# EAGLE board bromsbank (EAGLE 9.3.1)
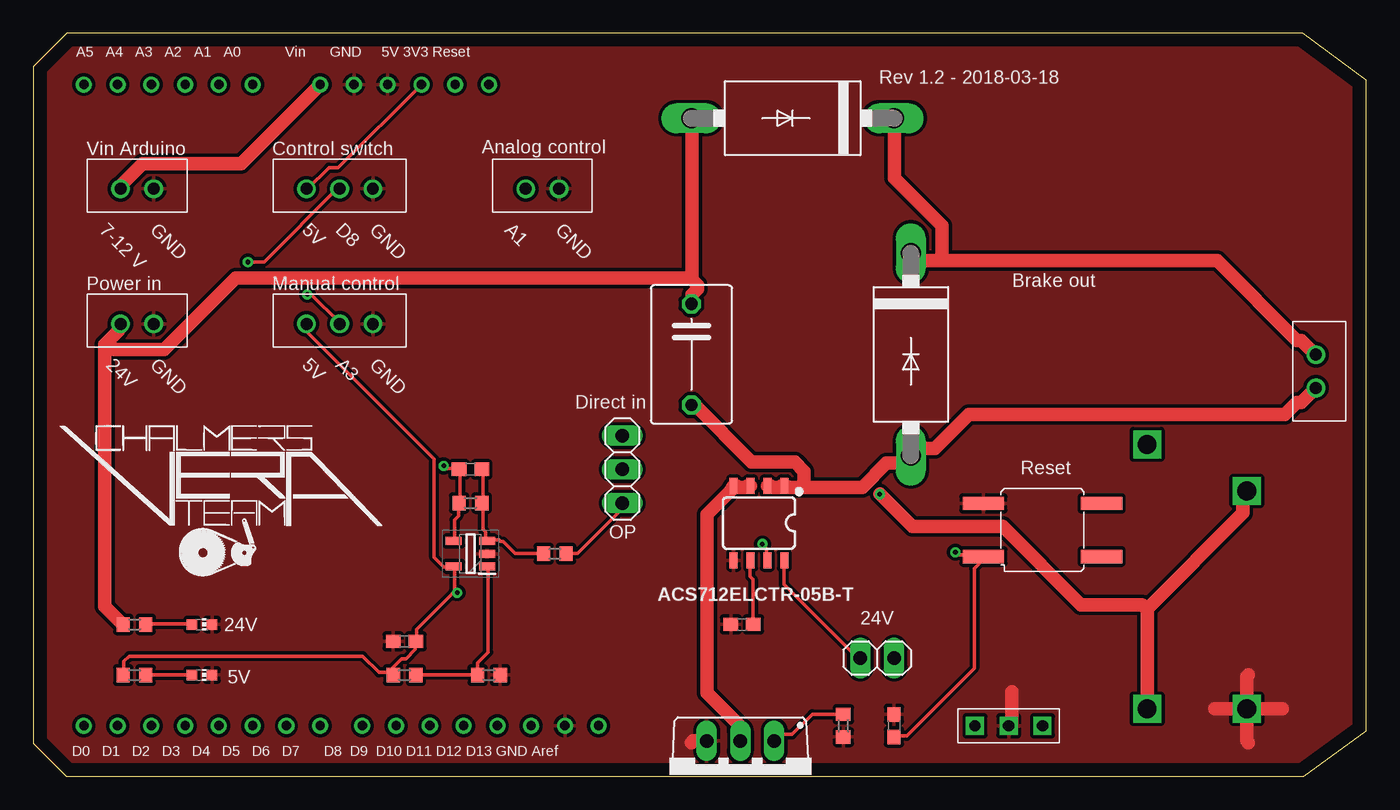
[diagram p0: board, top side]
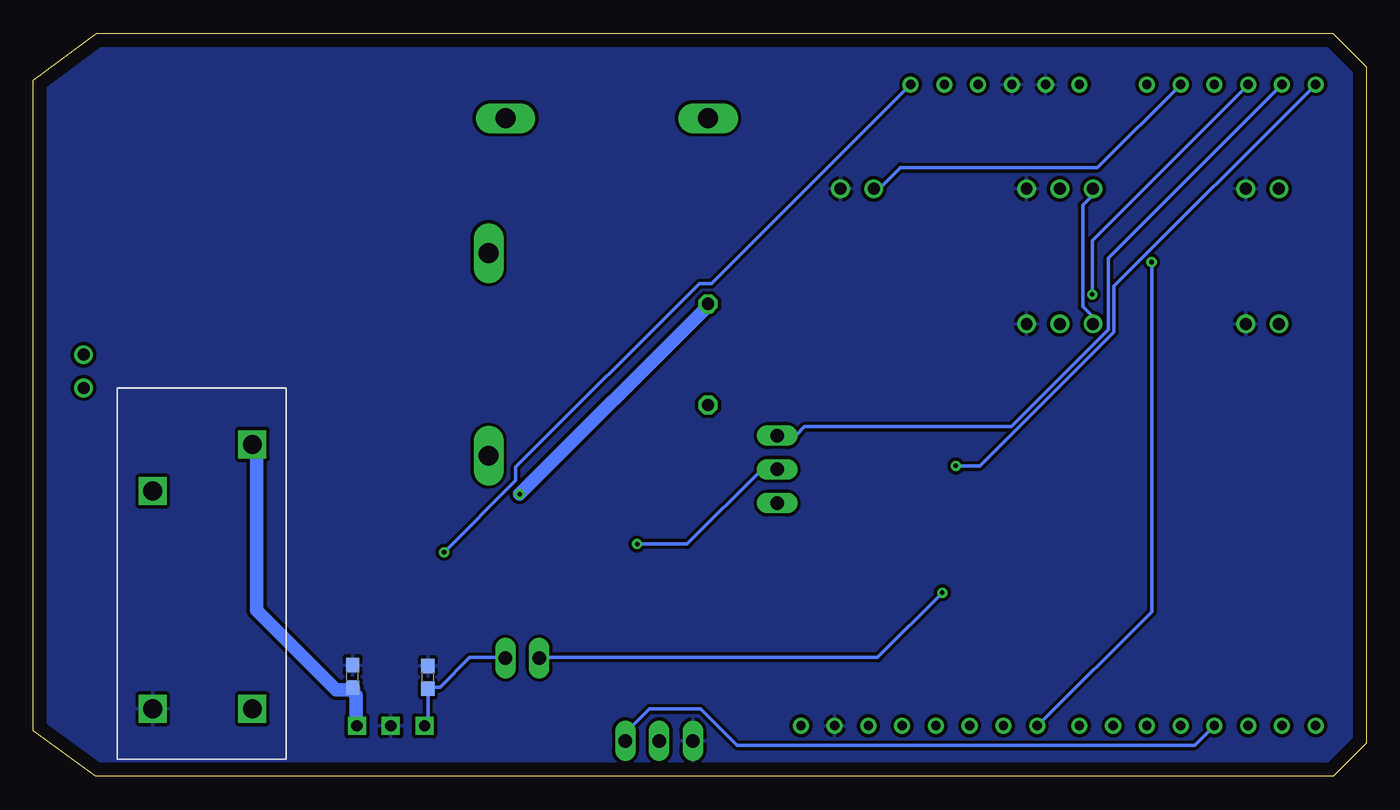
[diagram p1: board, bottom side, seen from below]

Size 100.31 x 55.93 mm. Coordinates in mm from the lower left corner, seen from the top.
Outline: 0,53.42 0,2.47 2.47,0 95.63,0 100.31,3.41 100.31,52.41 95.51,55.93 2.51,55.93 0,53.42
Copper layers (1*16): Top 0.035mm / dielectric 1.5mm / Bottom 0.035mm
Design rules "default": minimum track width 6mil, minimum drill 0.35mm, track to track 6mil, track to pad 6mil, pad to pad 6mil, via to via 6mil, smd to smd 6mil, copper to edge 40mil, drill to drill 6mil, minimum pad ring 10mil, minimum via ring 8mil, stop-mask expansion 4mil, vias tented up to drill 0mil, thermal gap 10mil
Net classes: 0 default: width 0.254 mm; 1 power: width 1.016 mm, clearance 0.254 mm

## Footprints (pad centres in the part's own frame; a part is rotated, then mirrored left to right if it is on the bottom)
CHIP-LED0603 = smd 0.8 x 0.8: A 0,-0.75; C 0,0.75
B2B-EH = drill 0.9: 1 -1.25,0; 2 1.25,0
B3B-EH = drill 0.9: 1 -2.5,0; 2 0,0; 3 2.5,0
C0603 = smd 1.1 x 1: 1 -0.85,0; 2 0.85,0
C075-063X106 = drill 0.914 octagon: 1 -3.81,0; 2 3.81,0
DO201-15 = drill 1.499 long: A 7.62,0; C -7.62,0
SOT95P280X145-5N = smd 1.2 x 0.6: 1 -1.25,0.95; 2 -1.25,0; 3 -1.25,-0.95; 4 1.25,-0.95; 5 1.25,0.95
1X03 = drill 1.016 long: 1 -2.54,0; 2 0,0; 3 2.54,0
1X02 = drill 1.016 long: 1 -1.27,0; 2 1.27,0
TO220BV = drill 1.016 long: D 0,-2.54; G -2.54,-2.54; S 2.54,-2.54
R0603 = smd 1 x 1.1: 1 -0.85,0; 2 0.85,0
KSEK43GLFS = smd 3.1 x 1: 1 -4.45,-2; 2 4.45,-2; 3 -4.45,2; 4 4.45,2
SO08 = smd 0.6 x 1.2: 1 -1.905,-2.8; 2 -0.635,-2.8; 3 0.635,-2.8; 4 1.905,-2.8; 5 1.905,2.8; 6 0.635,2.8; 7 -0.635,2.8; 8 -1.905,2.8
ARDUINO_UNO_SHIELD = drill 0.7: P$1 0,0; P$2 2.54,0; P$3 5.08,0; P$4 7.62,0; P$5 10.16,0; P$6 12.7,0; P$7 15.24,0; P$8 17.78,0; P$9 20.955,0; P$10 23.495,0; P$11 26.035,0; P$12 28.575,0; P$13 31.115,0; P$14 33.655,0; P$15 36.195,0; P$16 38.735,0; P$17 0,48.26; P$18 2.54,48.26; P$19 5.08,48.26; P$20 7.62,48.26; P$21 10.16,48.26; P$22 12.7,48.26; P$23 17.78,48.26; P$24 20.32,48.26; P$25 22.86,48.26; P$26 25.4,48.26; P$27 27.94,48.26; P$28 30.48,48.26
TO-220 = drill 0.85 square: P$1 -2.54,0; P$2 0,0; P$3 2.54,0
SDT-S-124DMR = drill 1.4 square: P$1 0,0; P$2 0,7.5; P$3 16.4,7.5; P$4 19.9,0

## Placement (x,y rotation side)
5V  CHIP-LED0603  [CHIP-LED0603]  12.7,7.62 270 top
BRAKE  EH_B2B-EH  [B2B-EH]  96.52,30.48 270 top
BRAKECONTROLSWITCH  EH_B3B-EH  [B3B-EH]  23.06,44.22 0 top
BRAKEINPUT  EH_B2B-EH  [B2B-EH]  38.31,44.22 0 top
BRAKEPOWER  CHIP-LED0603  [CHIP-LED0603]  12.7,11.43 270 top
C1  0.01µF  [C0603]  53.34,11.43 180 top
C2  0.01µF  [C0603]  27.94,10.16 180 top
C3  1000pF  [C0603]  32.9,23.1 0 top
C4  [C075-063X106]  49.53,31.75 270 top
C5  100n  [C0603]  64.77,3.81 270 top
C6  0.33µF  [C0603]  76.28,7.52 90 bottom
C7  0.1µF  [C0603]  70.61,7.46 90 bottom
D1  1N5400  [DO201-15]  57.15,49.53 180 top
D2  1N5400  [DO201-15]  66.04,31.75 270 top
IC1  LM321MF_NOPB  [SOT95P280X145-5N]  32.9,16.75 180 top
JP1  [1X03]  44.33,23.1 270 top
JP2  [1X02]  63.5,8.89 0 top
MANUALBRAKECONTROL  EH_B3B-EH  [B3B-EH]  23.06,34.06 0 top
POWERINPUT  EH_B2B-EH  [B2B-EH]  7.82,34.06 0 top
Q1  STP5NA50  [TO220BV]  53.21,0.13 180 top
R1  100k  [R0603]  27.94,7.62 0 top
R2  100k  [R0603]  34.29,7.62 0 top
R3  1k  [R0603]  39.25,16.75 180 top
R4  3k3  [R0603]  32.9,20.56 180 top
R5  10k  [R0603]  60.96,3.81 270 top
R6  1.2k  [R0603]  7.62,11.43 0 top
R7  330  [R0603]  7.62,7.62 0 top
S1  KSEK43GLFS  [KSEK43GLFS]  75.95,18.54 0 top
U$1  ACS712ELCTR-05B-T  [SO08]  54.61,19.05 180 top
U$2  ARDUINO_SHIELD  [ARDUINO_UNO_SHIELD]  3.81,3.81 0 top
U$3  L7805ABV-DG  [TO-220]  73.41,3.8 180 top
U$4  RELAY_SDT-S-124DMR,601  [SDT-S-124DMR]  83.82,5.08 90 bottom
VIN_ARDUINO  EH_B2B-EH  [B2B-EH]  7.82,44.22 0 top

## Library data of the parts
5V BRAKEPOWER = CASE-LED
BRAKE BRAKECONTROLSWITCH BRAKEINPUT MANUALBRAKECONTROL POWERINPUT VIN_ARDUINO = CASE-JST
C1 C6 C7 = CASE-RCL; SPICEPREFIX: C
C2 C3 C5 R1-R7 = CASE-RCL
C4 = rcl; SPICEPREFIX: C
D1 D2 = diode
IC1 = SamacSys_Parts; DESCRIPTION: Single SMT op amp,LM321MF 1MHz SOT23-5; HEIGHT: 1.45mm; MANUFACTURER_NAME: Texas Instruments; MANUFACTURER_PART_NUMBER: LM321MF/NOPB; MOUSER_PART_NUMBER: 926-LM321MF/NOPB
JP1 JP2 = CASE-Pinhead
Q1 = transistor-power
S1 = CASE-Switches
U$1-U$4 = CVT

## Nets
3V3: U$2.P$27
+5V: BRAKECONTROLSWITCH.1 C2.1 IC1.5 JP2.1 MANUALBRAKECONTROL.1 R1.1 R7.1 U$1.8 U$2.P$26
BRAKECONTROLOUT: Q1.G R5.1 U$2.P$4
BRAKEINPUT: BRAKEINPUT.1 U$2.P$21
BRAKESWITCH: BRAKECONTROLSWITCH.2 U$2.P$9
CURRENTIN [power]: BRAKE.2 C4.2 D2.A U$1.1 U$1.2
CURRENTOUT [power]: Q1.D U$1.3 U$1.4
CURRENTSENSE: C3.1 IC1.4 R4.2 U$2.P$17
CURRENTSENSENOOP: JP1.1 U$2.P$18
FILTER: C1.1 U$1.6
GND [power]: 5V.C BRAKECONTROLSWITCH.3 BRAKEINPUT.2 BRAKEPOWER.C C1.2 C2.2 C5.1 C6.2 C7.2 IC1.2 MANUALBRAKECONTROL.3 POWERINPUT.2 Q1.S R2.2 R5.2 S1.3 U$1.5 U$2.P$15 U$2.P$24 U$2.P$25 U$3.P$2 U$4.P$2 VIN_ARDUINO.2
N$1: IC1.1 R1.2 R2.1
N$2: BRAKEPOWER.A R6.2
N$3 [power]: BRAKE.1 D1.C D2.C
N$4: JP1.2 U$1.7
N$5: C5.2 S1.1 U$2.P$28
N$6: JP1.3 R3.1
N$7: 5V.A R7.2
N$8: C3.2 IC1.3 R3.2 R4.1
N$9: C7.1 JP2.2 U$3.P$3
N$10 [power]: C6.1 U$3.P$1 U$4.P$4
POT: MANUALBRAKECONTROL.2 U$2.P$19
V+ [power]: C4.1 D1.A POWERINPUT.1 R6.1 U$4.P$1 U$4.P$3
VIN [power]: U$2.P$23 VIN_ARDUINO.1

## Tracks (layer width: path | path; a pad name or v marks a point on that pad's centre or on a via)
+5V  (via drill 0.35)
  Top 0.254: U$2.P$26 22.96,45.82 22.25,45.82 20.62,44.2 BRAKECONTROLSWITCH.1 | U$1.8 56.49,16.15 56.49,14.43 61.98,8.94 62.18,8.94 JP2.1 | R7.1 6.81,7.62 6.81,8.64 7.21,9.04 24.79,9.04 26.01,7.82 26.82,7.82 27.03,7.62 R1.1 26.82,7.92 27.74,8.84 28.04,8.84 28.75,9.55 28.75,10.16 C2.1 28.85,10.26 28.85,11.07 31.7,13.92 | 31.7,13.92 31.7,15.75 IC1.5 31.6,15.75 30.89,15.75 30.18,16.46 30.18,23.88 20.62,33.43 20.62,34.04 MANUALBRAKECONTROL.1 | v31.9,13.82 31.8,13.92 31.7,13.92
  Bottom 0.254: MANUALBRAKECONTROL.1 20.62,34.14 20.62,34.65 21.34,35.36 21.34,42.98 20.62,43.69 20.62,44.2 BRAKECONTROLSWITCH.1 | v31.9,13.82 36.78,8.94 62.18,8.94 JP2.1
BRAKECONTROLOUT
  Top 0.254: R5.1 60.96,4.67 58.62,4.67 57.1,3.15 56.19,3.15 55.78,2.74 Q1.G
  Bottom 0.254: U$2.P$4 12.9,2.34 47.35,2.34 50.09,5.08 53.95,5.08 55.68,3.35 55.68,2.74 Q1.G
BRAKEINPUT
  Bottom 0.254: U$2.P$21 20.22,45.82 35.05,45.82 36.58,44.3 36.98,44.3 BRAKEINPUT.1
BRAKESWITCH  (via drill 0.35)
  Top 0.254: v16.15,38.71 17.37,38.71 22.96,44.3 BRAKECONTROLSWITCH.2
  Bottom 0.254: v16.15,38.71 16.15,12.39 24.69,3.86 U$2.P$9
CURRENTIN
  Top 1.016: U$1.2 55.27,21.84 55.47,21.84 55.58,21.74 56.19,21.74 56.29,21.84 56.49,21.84 U$1.1 57,21.74 58.01,21.74 | 58.01,21.74 62.38,21.74 64.21,23.57 65.53,23.57 66.04,24.08 D2.A 66.45,24.38 66.75,24.69 67.87,24.69 70.41,27.23 94.18,27.23 95.1,28.14 95.4,28.14 96.42,29.16 96.52,29.16 BRAKE.2 | C4.2 49.78,27.94 54.05,23.67 57.3,23.67 58.01,22.96 58.01,21.74
CURRENTOUT
  Top 1.016: U$1.3 53.95,21.84 53.75,21.84 53.65,21.74 53.03,21.74 52.93,21.84 52.73,21.84 U$1.4 52.43,21.44 50.7,19.71 50.7,6.3 53.24,3.76 53.24,2.74 Q1.D
CURRENTSENSE  (via drill 0.35)
  Top 0.254: IC1.4 31.7,17.78 31.7,19.3 32,19.61 32,20.52 R4.2 32.11,20.62 32.11,23.06 C3.1 32,23.16 31.09,23.16 v30.89,23.37
  Bottom 0.254: U$2.P$17 19,36.88 19,33.43 29.06,23.37 v30.89,23.37
CURRENTSENSENOOP
  Bottom 0.254: U$2.P$18 19.41,39.01 19.41,33.63 26.72,26.31 42.27,26.31 42.88,25.7 44.3,25.7 JP1.1
FILTER
  Top 0.254: C1.1 54.15,11.48 54.15,14.83 53.95,15.04 53.95,16.15 U$1.6
GND
  Top 1.016: Q1.S 49.66,2.67 49.53,2.54 | U$3.P$2 73.66,4.05 73.66,6.35 | U$4.P$2 91.32,7.5 91.44,7.62 | U$4.P$2 93.98,5.08 | U$4.P$2 91.32,2.66 91.44,2.54 | U$4.P$2 88.9,5.08
  pour Bottom: -8.56,57.44 96.13,57.44 110.02,43.56 110.02,9.81 94.17,-6.04 -4.27,-6.04
  pour Top: 52.78,109.11 133.96,27.93 103.29,-2.74 -59.08,-2.74
N$1
  Top 0.254: R1.2 R2.1 33.43,7.72 33.43,8.53 34.24,9.35 34.24,15.75 IC1.1
N$2
  Top 0.254: BRAKEPOWER.A 11.89,11.48 8.53,11.48 R6.2
N$3
  Top 1.016: 68.38,38.81 66.55,38.81 66.04,39.32 D2.C | 68.38,38.81 89.1,38.81 95.1,32.82 95.4,32.82 96.42,31.8 96.52,31.8 BRAKE.1 | 68.38,38.81 68.38,41.45 64.82,45.01 64.82,49.48 D1.C
N$4  (via drill 0.35)
  Top 0.254: v54.86,17.48 55.17,17.17 55.17,16.26 U$1.7
  Bottom 0.254: v54.86,17.48 51.1,17.48 45.52,23.06 44.4,23.06 JP1.2
N$5  (via drill 0.35)
  Top 0.254: C5.2 64.82,3.05 65.73,3.05 70.81,8.13 70.81,15.65 71.42,16.26 71.42,16.46 S1.1 71.32,16.46 71.12,16.66 69.6,16.66 v69.39,16.87
  Bottom 0.254: U$2.P$28 49.28,37.08 50.19,37.08 64.01,23.27 64.01,22.25 v69.39,16.87
N$6
  Top 0.254: R3.1 40.13,16.76 40.95,16.76 44.3,20.12 44.3,20.52 JP1.3
N$7
  Top 0.254: R7.2 5V.A
N$8
  Top 0.254: C3.2 33.83,23.06 33.83,20.62 R4.1 33.83,20.52 33.83,18.59 34.04,18.39 34.04,17.68 IC1.3 34.24,17.78 35.05,17.78 35.15,17.68 35.36,17.68 36.27,16.76 38.3,16.76 R3.2
N$9
  Bottom 0.254: U$3.P$3 70.81,3.86 70.61,4.06 C7.1 70.61,6.71 69.7,6.71 67.46,8.94 64.82,8.94 JP2.2
N$10
  Bottom 1.016: U$3.P$1 76,3.86 76,6.1 76.2,6.3 76.2,6.6 C6.1 76.71,6.5 77.52,6.5 83.52,12.5 83.52,24.59 83.82,24.89 U$4.P$4
POT  (via drill 0.35)
  Top 0.254: v20.62,36.27 20.93,36.27 23.06,34.14 MANUALBRAKECONTROL.2
  Bottom 0.254: U$2.P$19 20.62,40.34 v20.62,36.27
V+  (via drill 0.35)
  Top 1.016: 83.82,12.6 U$4.P$1 | 83.82,12.6 91.03,19.81 91.03,21.23 91.24,21.44 U$4.P$3 | 49.58,37.39 49.99,36.98 49.99,36.68 49.58,36.27 49.58,35.56 C4.1 | 49.58,37.39 49.58,49.48 D1.A | 5.54,32.66 6.4,33.53 6.4,33.63 6.6,33.83 6.6,34.04 POWERINPUT.1 | 5.54,32.66 5.38,32.51 5.38,12.8 6.71,11.48 R6.1 | 49.58,37.39 49.17,37.49 15.24,37.49 9.86,32.11 6.1,32.11 5.54,32.66 | v63.7,21.23 66.14,18.8 72.95,18.8 78.84,12.9 83.41,12.9 83.82,12.6
  Bottom 1.016: v63.7,21.23 49.58,35.36 49.58,35.56 C4.1
VIN
  Top 1.016: U$2.P$23 15.65,46.13 8.23,46.13 6.6,44.5 6.6,44.3 VIN_ARDUINO.1

## Text on the board
tNames: A5 A4 A3 A2 A1 A0 Vin GND 5V 3V3 Reset | Rev 1.2 - 2018-03-18 | Vin Arduino | Control switch | Analog control | 7-12 V | GND | 5V | D8 | GND | A1 | GND | Power in | Manual control | Brake out | 24V | GND | 5V | A3 | GND | Direct in | Reset | OP | 24V | 24V | D0 D1 D2 D3 D4 D5 D6 D7 D8 D9 D10 D11 D12 D13 GND Aref